# EAGLE board air_flow (EAGLE 9.5.2)

Size 100 x 80 mm. Coordinates in mm from the lower left corner, seen from the top.
Outline: 0,0 100,0 100,80 0,80 0,0
Copper layers (1*16): Top 0.035mm / dielectric 1.5mm / Bottom 0.035mm
Design rules "default": minimum track width 6mil, minimum drill 0.35mm, track to track 6mil, track to pad 6mil, pad to pad 6mil, via to via 6mil, smd to smd 6mil, copper to edge 40mil, drill to drill 6mil, minimum pad ring 10mil, minimum via ring 8mil, stop-mask expansion 4mil, vias tented up to drill 0mil, thermal gap 10mil

## Footprints (pad centres in the part's own frame; a part is rotated, then mirrored left to right if it is on the bottom)
CAP-PTH-SMALL-KIT = drill 1.016 pad 2.032: 1 -1.397,0; 2 1.397,0
E3,5-8 = drill 0.813 pad 1.6: + -1.778,0 | drill 0.813 pad 1.6 octagon: - 1.778,0
SMT-JUMPER_2_NO_NO-SILK = smd 0.635 x 1.27: 1 -0.406,0; 2 0.406,0
SMT-JUMPER_2_NC_TRACE_SILK = smd 0.635 x 1.27: 1 -0.508,0; 2 0.508,0
FEATHERWING_DIM = drill 1 pad 1.778: 1 6.35,1.27; 2 8.89,1.27; 3 11.43,1.27; 4 13.97,1.27; 5 16.51,1.27; 6 19.05,1.27; 7 21.59,1.27; 8 24.13,1.27; 9 26.67,1.27; 10 29.21,1.27; 11 31.75,1.27; 12 34.29,1.27; 13 36.83,1.27; 14 39.37,1.27; 15 41.91,1.27; 16 44.45,1.27; 17 44.45,21.59; 18 41.91,21.59; 19 39.37,21.59; 20 36.83,21.59; 21 34.29,21.59; 22 31.75,21.59; 23 29.21,21.59; 24 26.67,21.59; 25 24.13,21.59; 26 21.59,21.59; 27 19.05,21.59; 28 16.51,21.59
AXIAL-0.3 = drill 0.9 pad 1.88: P$1 -3.81,0; P$2 3.81,0
STANDOFF_ELECTRICAL_5_32 = drill 3.969 pad 7.62: P1 0,0
DIP08 = drill 0.813 pad 1.626: 1 -3.81,-3.81; 2 -1.27,-3.81; 3 1.27,-3.81; 4 3.81,-3.81; 5 3.81,3.81; 6 1.27,3.81; 7 -1.27,3.81; 8 -3.81,3.81
TO220-IGO = drill 1 pad 1.88: GND 0,0; OUT 2.54,0 | drill 1 pad 1.88 square: IN -2.54,0
OLED_1306 = drill 1.016 pad 1.88: 3V 11.15,-1.55; GND 8.61,-1.55; SCK 13.69,-1.55; SDA 16.23,-1.55
MP3V5004GP = smd 2.54 x 1.524: 1 -8.388,3.81; 2 -8.388,1.27; 3 -8.388,-1.27; 4 -8.388,-3.81; 5 8.388,-3.81; 6 8.388,-1.27; 7 8.388,1.27; 8 8.388,3.81
MP3V5004DP = smd 2.54 x 1.524: 1 -8.388,3.81; 2 -8.388,1.27; 3 -8.388,-1.27; 4 -8.388,-3.81; 5 8.388,-3.81; 6 8.388,-1.27; 7 8.388,1.27; 8 8.388,3.81
HIH8120_TH = drill 0.635 pad 1.016: 1 -1.905,0; 2 -0.635,0; 3 0.635,0; 4 1.905,0
ADAFRUIT_ITS_MO_28 = drill 1.016 pad 1.88: 2 -7.62,-8.89; 3V -7.62,21.59; A0 -7.62,13.97; A1 -7.62,11.43; A2 -7.62,8.89; A3 -7.62,6.35; A4 -7.62,3.81; A5 -7.62,1.27; AREF -7.62,19.05; D5 7.62,1.27; D7 7.62,3.81; D9 7.62,6.35; D10 7.62,8.89; D11 7.62,11.43; D12 7.62,13.97; D13 7.62,16.51; GND 7.62,21.59; MISO -7.62,-6.35; MOSI -7.62,-3.81; RES -7.62,24.13; RX 7.62,-8.89; SCK -7.62,-1.27; SCL 7.62,-1.27; SDA 7.62,-3.81; TX 7.62,-6.35; USB 7.62,19.05; VHI -7.62,16.51; VIN 7.62,24.13

## Placement (x,y rotation side)
C1  0.1uF  [CAP-PTH-SMALL-KIT]  -34.29,-26.67 0 top  (outside the outline)
C2  1uF  [CAP-PTH-SMALL-KIT]  -34.29,-30.48 0 top  (outside the outline)
C3  470pF  [CAP-PTH-SMALL-KIT]  -34.29,-34.29 0 top  (outside the outline)
C4  0.1uF  [CAP-PTH-SMALL-KIT]  -34.29,-38.1 0 top  (outside the outline)
C5  1uF  [CAP-PTH-SMALL-KIT]  -34.29,-41.91 0 top  (outside the outline)
C6  470pF  [CAP-PTH-SMALL-KIT]  -34.29,-45.72 0 top  (outside the outline)
C7  0.22uF  [CAP-PTH-SMALL-KIT]  -34.29,-127 0 top  (outside the outline)
C8  100uF  [E3,5-8]  82.55,19.05 180 top
C9  1uF  [CAP-PTH-SMALL-KIT]  73.66,15.24 180 top
JP1  JUMPER-SMT_2_NO_NO-SILK  [SMT-JUMPER_2_NO_NO-SILK]  -48.26,-187.96 0 top  (outside the outline)
JP2  JUMPER-SMT_2_NC_TRACE_SILK  [SMT-JUMPER_2_NC_TRACE_SILK]  -39.37,-187.96 0 top  (outside the outline)
MS2  FEATHERWING_NODIM  [FEATHERWING_DIM]  48.26,74.93 270 top
R1  10k  [AXIAL-0.3]  -31.75,-119.38 0 top  (outside the outline)
R2  10k  [AXIAL-0.3]  -31.75,-123.19 0 top  (outside the outline)
R3  TBD  [AXIAL-0.3]  -31.75,-151.13 0 top  (outside the outline)
R4  TBD  [AXIAL-0.3]  -31.75,-154.94 0 top  (outside the outline)
R5  TBD  [AXIAL-0.3]  -31.75,-158.75 0 top  (outside the outline)
R6  TBD  [AXIAL-0.3]  -31.75,-162.56 0 top  (outside the outline)
R7  TBD  [AXIAL-0.3]  -31.75,-177.8 0 top  (outside the outline)
R8  TBD  [AXIAL-0.3]  -31.75,-181.61 0 top  (outside the outline)
R9  TBD  [AXIAL-0.3]  -31.75,-185.42 0 top  (outside the outline)
R10  TBD  [AXIAL-0.3]  -31.75,-189.23 0 top  (outside the outline)
S1  STANDOFF_ELECTRICAL5-32  [STANDOFF_ELECTRICAL_5_32]  5.08,74.93 0 top
S2  STANDOFF_ELECTRICAL5-32  [STANDOFF_ELECTRICAL_5_32]  95.25,74.93 0 top
U1  LM358  [DIP08]  17.78,22.86 90 top
U2  LM358  [DIP08]  38.1,22.86 90 top
U7  [TO220-IGO]  77.47,7.62 180 top
U$1  OLED_1306  [OLED_1306]  21.59,72.39 0 top
U$2  MP3V5004GSINGLE  [MP3V5004GP]  17.28,6.35 180 top
U$3  MP3V5004GDUAL  [MP3V5004DP]  39.37,6.35 180 top
U$4  HIH8000_  [HIH8120_TH]  38.1,38.1 0 bottom
U$45  ADAFRUIT_ITSY_M0_28  [ADAFRUIT_ITS_MO_28]  59.69,48.26 0 top

## Library data of the parts
C1-C7 C9 = SparkFun-Capacitors; PROD_ID: CAP-08370
C8 = rcl; SPICEPREFIX: C
JP1 JP2 = SparkFun-Jumpers
MS2 S1 S2 = th_libraries
R1-R10 = SparkFun-Resistors; PROD_ID: RES-09435
U1 U2 = SparkFun-IC-Amplifiers; PROD_ID: IC-09172
U7 = SparkFun-IC-Power
U$1 = air_flow
U$2-U$4 = air_flow_2
U$45 = easy_bee_counter

## Nets
3.3V: C1.2 C2.2 C4.2 C5.2 C7.2 C8.+ R1.P$2 R2.P$2 U1.8 U2.8 U7.OUT U$1.3V U$2.2 U$3.2 U$4.1
A0: MS2.5 R7.P$2 U2.1 U$45.A0
A1: MS2.6 R8.P$2 U2.7 U$45.A1
A2: MS2.7 R3.P$2 U1.1 U$45.A2
A3: MS2.8 R4.P$2 U1.7 U$45.A3
D_OUT: C6.1 U2.2 U2.6 U$3.4
GND: C1.1 C2.1 C3.2 C4.1 C5.1 C6.2 C7.1 C8.- C9.2 MS2.4 R5.P$2 R6.P$2 R9.P$2 R10.P$2 S1.P1 S2.P1 U1.4 U2.4 U7.GND U$1.GND U$2.3 U$3.3 U$4.2 U$45.GND
N$1: R3.P$1 R5.P$1 U1.3
N$3: JP1.1
N$5: R4.P$1 R6.P$1 U1.5
N$6: R7.P$1 R9.P$1 U2.3
N$8: R8.P$1 R10.P$1 U2.5
S_OUT: C3.1 U1.2 U1.6 U$2.4
SCL: MS2.18 R2.P$1 U$1.SCK U$4.3 U$45.SCL
SDA: MS2.17 R1.P$1 U$1.SDA U$4.4 U$45.SDA
USB: JP1.2 MS2.26 U$45.USB
VBAT: JP2.2 MS2.28
VIN: C9.1 JP2.1 U7.IN

## Tracks (layer width: path | path; a pad name or v marks a point on that pad's centre or on a via)
3.3V  (14 unrouted)
A0  (3 unrouted)
A1  (3 unrouted)
A2  (3 unrouted)
A3  (3 unrouted)
D_OUT  (3 unrouted)
GND  (23 unrouted)
N$1  (2 unrouted)
N$5  (2 unrouted)
N$6  (2 unrouted)
N$8  (2 unrouted)
S_OUT  (3 unrouted)
SCL  (4 unrouted)
SDA  (4 unrouted)
USB  (2 unrouted)
VBAT  (1 unrouted)
VIN  (2 unrouted)